# Altium PCB Rackmount_DSP.PcbDoc (part 2 of 24)
Units mil, origin at the board's own origin, x right, y up, seen from the top; angles counter-clockwise.
Board outline 10629.92 x 8267.72 mil, 4 copper layers (Top Layer, Mid Layer 1, Mid Layer 2, Bottom Layer), stack 36.2 mil thick; 4500 components, 1565 nets, 9765 pads, 3289 vias.
Unrouted connection lines stored in the file: 1.
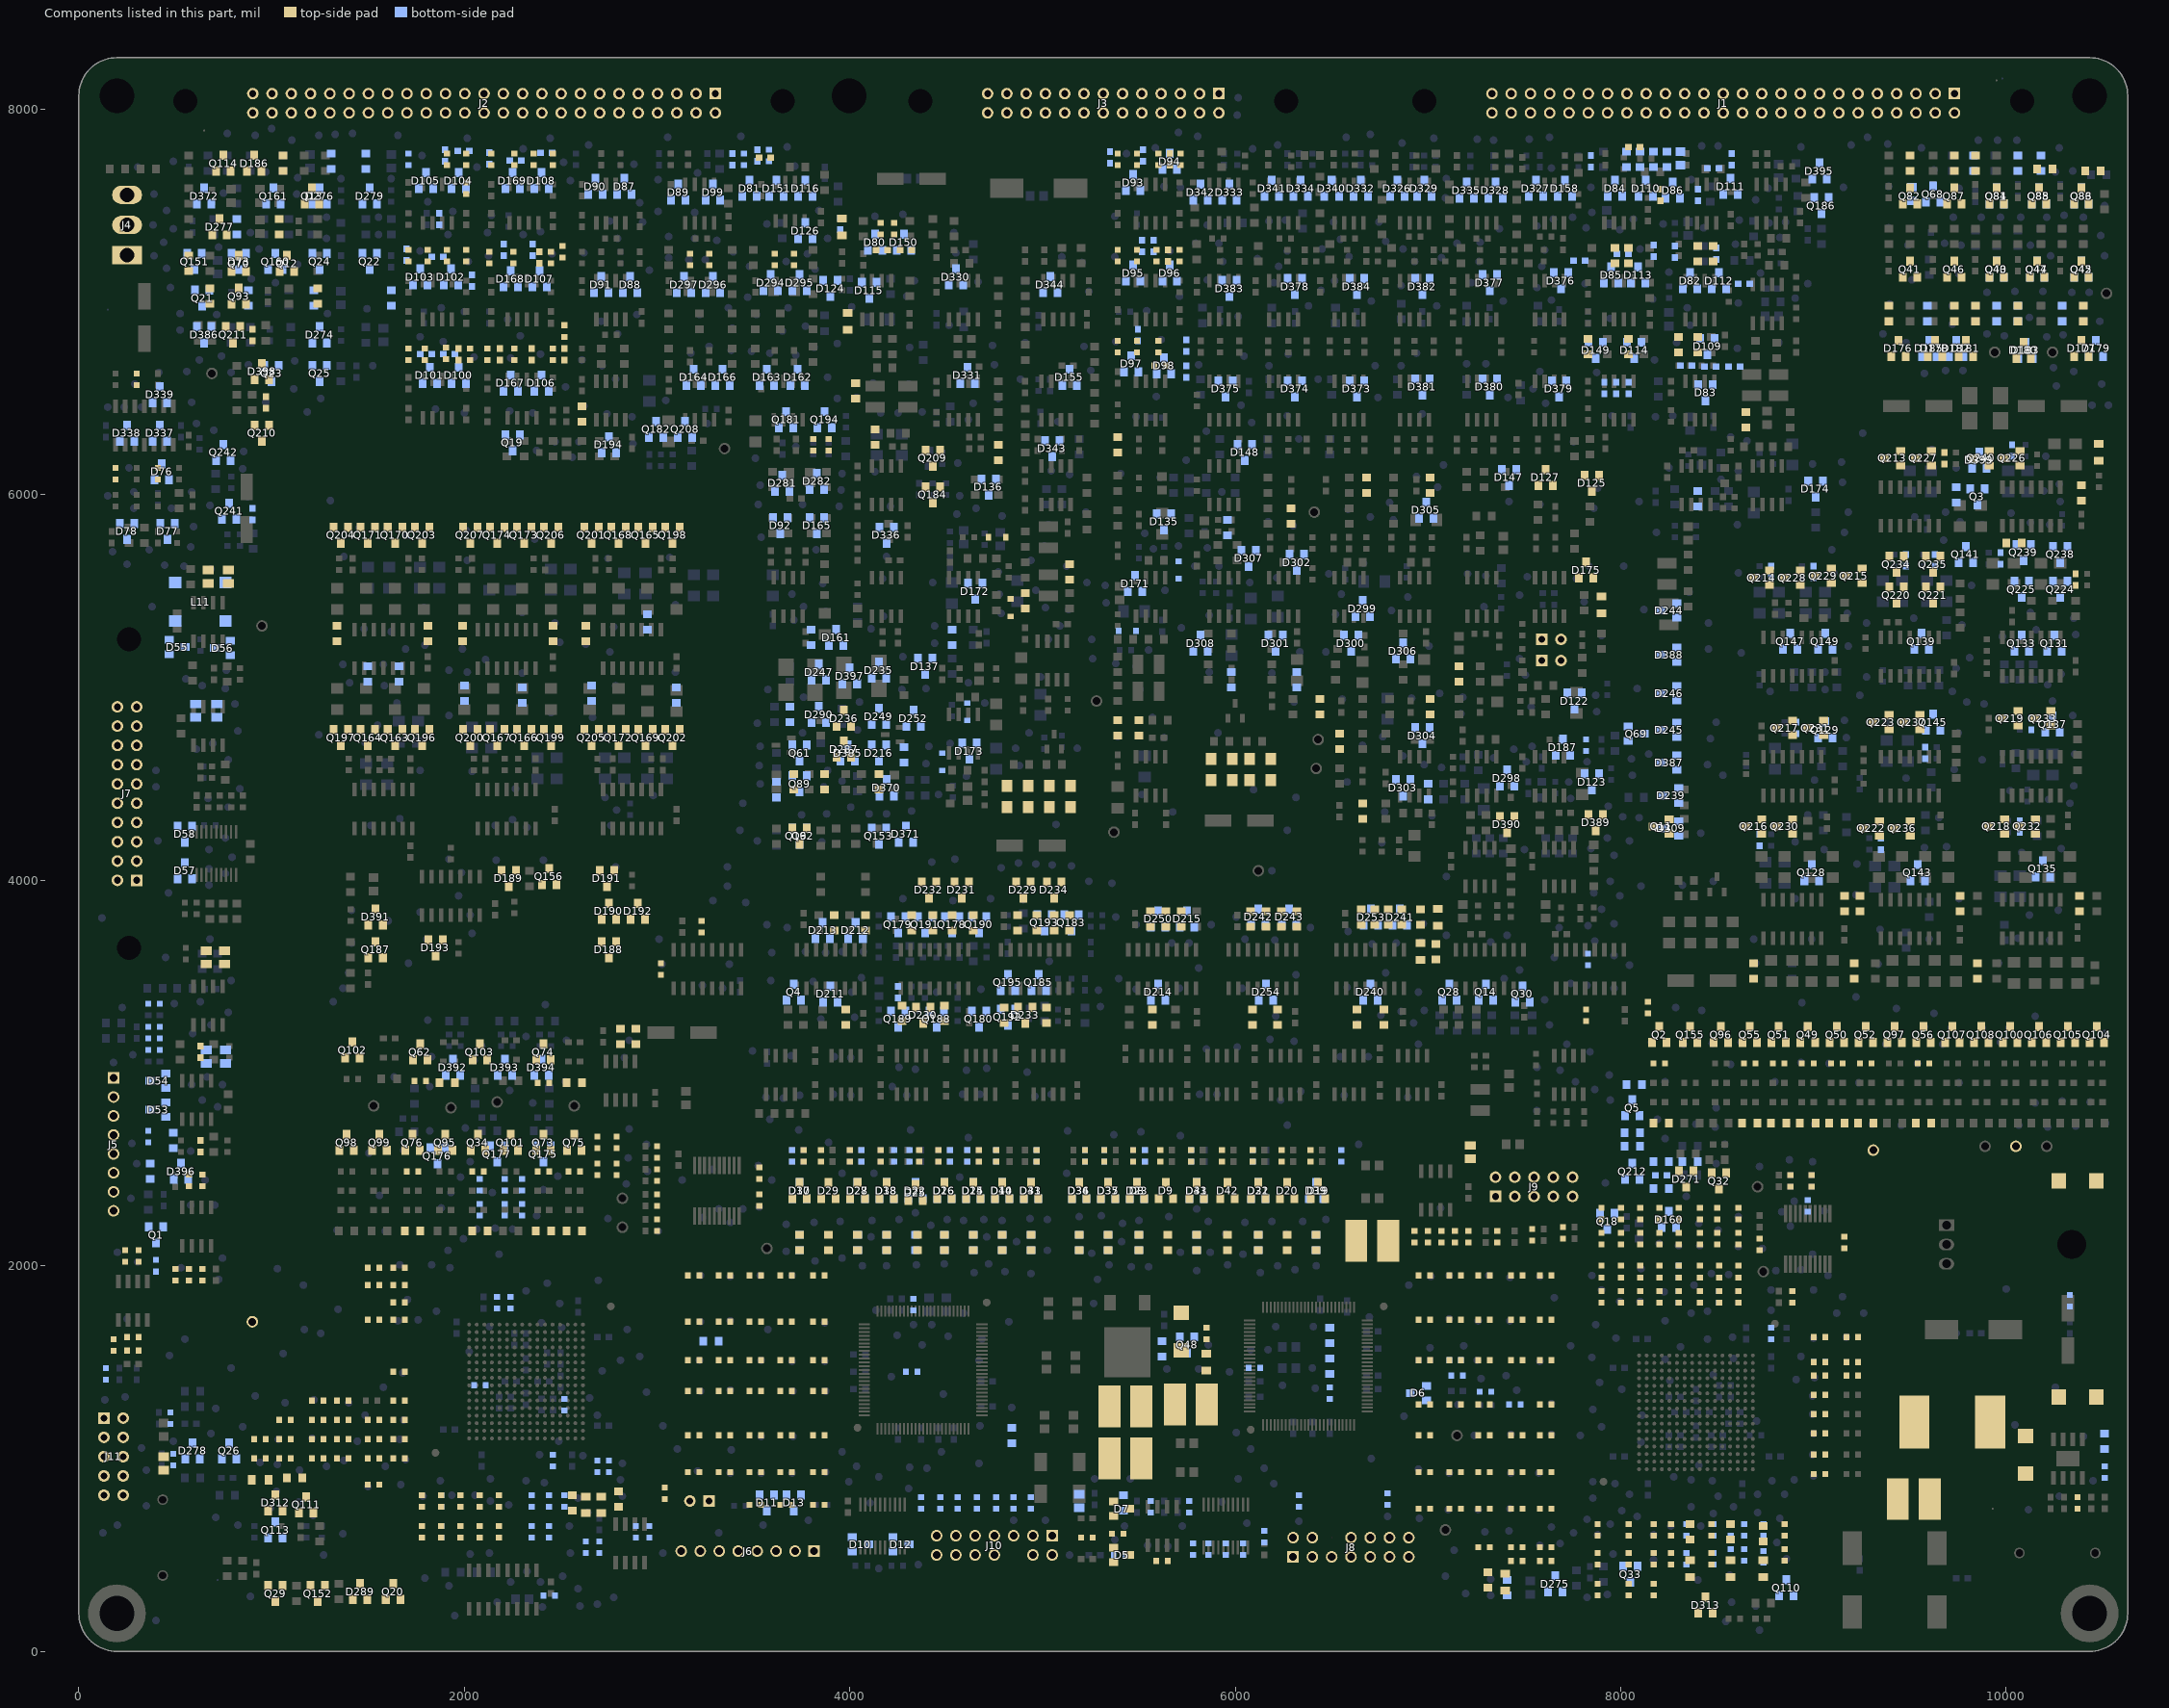
[diagram p4: the components of this part, seen from the top]

## Components (designator, comment, footprint, x,y, rotation, side; value= is the part's Value field where it differs from the comment) (continued)
C1156 "08070504" sc0603 4250,3420 r90 bottom
C1157 "08070504" sc0603 900,6830 r90 top
C1158 "08070230" sc0603 970,6480 r270 top
C1159 "08070230" sc0603 8210,2470 r180 bottom
C1160 "08070230" sc0603 10030,6230 r270 bottom
C1161 "08070230" sc0603 9680,6190 r270 top
C1162 "08070230" sc0603 9480,5660 r270 bottom
C1163 "08070230" sc0603 9630,5660 r270 bottom
C1164 "08070230" sc0603 9580,4660 r90 bottom
C1165 "08070230" sc0603 9350,4190 r270 bottom
C1166 "08070230" sc0603 8780,5600 r270 bottom
C1167 "08070230" sc0603 9000,5600 r270 bottom
C1168 "08070230" sc0603 8720,4210 r270 bottom
C1169 "08070230" sc0603 8910,4790 r270 bottom
C1170 "08070230" sc0603 10360,5560 r270 top
C1171 "08070230" sc0603 9970,5670 r270 bottom
C1172 "08070230" sc0603 10070,4280 r270 bottom
C1173 "08070230" sc0603 10130,4810 r270 bottom
C1174 "08070247" sc0603 630,2620 r270 top
C1175 "08070247" sc0603 630,3110 r90 top
C1176 "08070018" SC0805 8310,7745 r270 bottom
C1177 "08070018" SC0805 9510,7560 r270 bottom
C1178 "08070230" sc0603 900,5900 r270 bottom
C1200 "08070230" sc0603 5350,7750 r90 bottom
C1201 "08070230" sc0603 5520,7760 r90 bottom
C1202 "08070230" sc0603 5660,7740 r270 top
C1203 "08070230" sc0603 5515,7290 r90 bottom
C1204 "08070230" sc0603 5575,7290 r90 bottom
C1205 "08070230" sc0603 5650,7240 r270 top
C1206 "08070230" sc0603 5495,6830 r90 bottom
C1207 "08070230" sc0603 5745,6775 r270 bottom
C1208 "08070230" sc0603 5745,6640 r270 bottom
C1209 "08070230" sc0603 1800,6730 r180 bottom
C1210 "08070230" sc0603 1920,6730 r0 bottom
C1211 "08070230" sc0603 1970,6730 r270 top
C1212 "08070230" sc0603 1700,7245 r90 bottom
C1213 "08070230" sc0603 1860,7235 r0 bottom
C1214 "08070230" sc0603 2040,7110 r270 bottom
C1215 "08070230" sc0603 1900,7760 r90 bottom
C1216 "08070230" sc0603 1995,7785 r0 bottom
C1217 "08070230" sc0603 1870,7430 r270 bottom
C1218 "08070230" sc0603 8340,6670 r180 bottom
C1219 "08070230" sc0603 8465,6665 r0 bottom
C1220 "08070230" sc0603 8590,6665 r0 bottom
C1221 "08070230" sc0603 7845,7730 r90 bottom
C1222 "08070230" sc0603 8070,7805 r0 top
C1223 "08070230" sc0603 8205,7555 r270 top
C1224 "08070230" sc0603 8400,7555 r270 bottom
C1225 "08070230" sc0603 8480,7695 r0 bottom
C1226 "08070230" sc0603 8575,7740 r90 bottom
C1227 "08070230" sc0603 8280,7260 r90 bottom
C1228 "08070230" sc0603 8495,7250 r270 bottom
C1229 "08070230" sc0603 8640,7095 r180 bottom
C1230 "08070230" sc0603 2185,6730 r90 top
C1231 "08070230" sc0603 2350,6730 r90 top
C1232 "08070230" sc0603 2520,6730 r270 top
C1233 "08070230" sc0603 2205,7270 r90 bottom
C1234 "08070230" sc0603 2355,7270 r90 bottom
C1235 "08070230" sc0603 2390,7230 r270 top
C1236 "08070230" sc0603 2130,7745 r90 bottom
C1237 "08070230" sc0603 2265,7735 r0 bottom
C1238 "08070230" sc0603 2425,7775 r0 bottom
C1239 "08070230" sc0603 7785,7215 r180 bottom
C1240 "08070230" sc0603 8010,7250 r0 bottom
C1241 "08070230" sc0603 8170,7265 r270 bottom
C1242 "08070230" sc0603 7915,6555 r270 bottom
C1243 "08070230" sc0603 7975,6555 r270 bottom
C1244 "08070230" sc0603 8040,6555 r270 bottom
C1245 "08070230" sc0603 3950,7405 r90 bottom
C1246 "08070230" sc0603 4165,7270 r0 top
C1247 "08070230" sc0603 4290,7270 r0 top
C1248 "08070230" sc0603 3390,7740 r90 bottom
C1249 "08070230" sc0603 3520,7760 r270 bottom
C1250 "08070230" sc0603 3560,7750 r180 top
D1 "15010198" SD2216 10370,2440 r180 top
D2 "15010198" SD2216 10100,1020 r270 top
D3 "15010198" SD2216 10370,1320 r180 top
D4 "15010198" SD2216 5720,1660 r270 top
D5 "15010249" sot23-1 5410,500 r270 top
D6 "15010249" sot23-1 6950,1340 r270 bottom
D7 "15010249" sot23-1 5410,740 r270 top
D8 "15010249" sot23-1 5490,2390 r180 bottom
D9 "15010249" sot23-1 5640,2390 r0 top
D10 "15010249" sot23-1 4055,555 r90 bottom
D11 "15010249" sot23-1 3570,770 r0 bottom
D12 "15010249" sot23-1 4265,555 r90 bottom
D13 "15010249" sot23-1 3710,770 r0 bottom
D14 "15010249" sot23-1 4790,2390 r0 top
D15 "15010249" sot23-1 4640,2390 r180 bottom
D16 "15010249" sot23-1 4490,2390 r0 top
D17 "15010249" sot23-1 3740,2390 r180 bottom
D18 "15010249" sot23-1 4190,2390 r0 top
D19 "15010249" sot23-1 6430,2390 r0 top
D20 "15010249" sot23-1 6270,2390 r0 top
D21 "15010249" sot23-1 6120,2390 r0 top
D22 "15010249" sot23-1 4340,2390 r180 bottom
D23 "15010249" sot23-1 5490,2390 r0 top
D24 "15010249" sot23-1 4640,2390 r0 top
D25 "15010249" sot23-1 4340,2380 r0 top
D26 "15010249" sot23-1 4490,2390 r180 bottom
D27 "15010249" sot23-1 4040,2390 r180 bottom
D28 "15010249" sot23-1 4040,2390 r0 top
D29 "15010249" sot23-1 3890,2390 r0 top
D30 "15010249" sot23-1 3740,2390 r0 top
D31 "15010249" sot23-1 5800,2390 r180 bottom
D32 "15010249" sot23-1 6120,2390 r180 bottom
D33 "15010249" sot23-1 4940,2390 r180 bottom
D34 "15010249" sot23-1 5190,2390 r180 bottom
D35 "15010249" sot23-1 5340,2390 r180 bottom
D36 "15010249" sot23-1 5190,2390 r0 top
D37 "15010249" sot23-1 5340,2390 r0 top
D38 "15010249" sot23-1 4190,2390 r180 bottom
D39 "15010249" sot23-1 6420,2390 r180 bottom
D40 "15010249" sot23-1 4790,2390 r180 bottom
D41 "15010249" sot23-1 4940,2390 r0 top
D42 "15010249" sot23-1 5960,2390 r0 top
D43 "15010249" sot23-1 5800,2390 r0 top
D44 "15020063" SD0805 7400,360 r90 top
D45 "15020063" SD0805 5850,1500 r90 top
D46 "15020063" SD0805 6960,3630 r90 top
D47 "15020063" SD0805 8740,430 r270 top
D48 "15020063" SD0805 940,890 r180 top
D49 "15020063" SD0805 10480,6220 r90 top
D50 "15020063" SD0805 7050,3809.09 r270 top
D51 "15020063" SD0805 8570,430 r270 top
D52 "15020063" SD0805 2710,760 r90 top
D53 "15040117" sot23-1 410,2810 r270 bottom
D54 "15040117" sot23-1 410,2960 r270 bottom
D55 "15040117" sot23-1 510,5210 r90 bottom
D56 "15040117" sot23-1 745,5205 r270 bottom
D57 "15040117" sot23-1 550,4050 r180 bottom
D58 "15040117" sot23-1 550,4240 r0 bottom
D67 "15020062" SD0805 8360,430 r270 top
D68 "15020062" SD0805 2630,760 r90 top
D70 "15020062" SD0805 7900,5430 r90 top
D71 "15020062" SD0805 3990,6900 r270 top
D72 "15020062" SD0805 3960,7390 r90 top
D73 "15010035" sot23-1 830,7210 r0 bottom
D76 "15010035" sot23-1 430,6120 r180 bottom
D77 "15010035" sot23-1 460,5810 r0 bottom
D78 "15010035" sot23-1 250,5810 r0 bottom
D80 "15010035" sot23-1 4130,7310 r180 bottom
D81 "15010035" sot23-1 3480,7590 r180 bottom
D82 "15010035" sot23-1 8360,7110 r180 bottom
D83 "15010035" sot23-1 8440,6530 r0 bottom
D84 "15010035" sot23-1 7970,7590 r180 bottom
D85 "15010035" sot23-1 7950,7140 r180 bottom
D86 "15010035" sot23-1 8270,7580 r180 bottom
D87 "15010035" sot23-1 2830,7600 r180 bottom
D88 "15010035" sot23-1 2860,7090 r180 bottom
D89 "15010035" sot23-1 3110,7570 r180 bottom
D90 "15010035" sot23-1 2680,7600 r180 bottom
D91 "15010035" sot23-1 2710,7090 r180 bottom
D92 "15010035" sot23-1 3640,5840 r0 bottom
D93 "15010035" sot23-1 5470,7620 r180 bottom
D94 "15010035" sot23-1 5660,7730 r180 bottom
D95 "15010035" sot23-1 5470,7150 r180 bottom
D96 "15010035" sot23-1 5660,7150 r180 bottom
D97 "15010035" sot23-1 5460,6680 r180 bottom
D98 "15010035" sot23-1 5630,6670 r180 bottom
D99 "15010035" sot23-1 3290,7570 r180 bottom
D100 "15010035" sot23-1 1970,6620 r180 bottom
D101 "15010035" sot23-1 1820,6620 r180 bottom
D102 "15010035" sot23-1 1930,7130 r180 bottom
D103 "15010035" sot23-1 1770,7130 r180 bottom
D104 "15010035" sot23-1 1970,7630 r180 bottom
D105 "15010035" sot23-1 1800,7630 r180 bottom
D106 "15010035" sot23-1 2400,6580 r180 bottom
D107 "15010035" sot23-1 2390,7120 r180 bottom
D108 "15010035" sot23-1 2400,7630 r180 bottom
D109 "15010035" sot23-1 8450,6770 r0 bottom
D110 "15010035" sot23-1 8130,7590 r180 bottom
D111 "15010035" sot23-1 8570,7600 r180 bottom
D112 "15010035" sot23-1 8510,7110 r180 bottom
D113 "15010035" sot23-1 8090,7140 r180 bottom
D114 "15010035" sot23-1 8070,6750 r0 bottom
D115 "15010035" sot23-1 4100,7060 r0 bottom
D116 "15010035" sot23-1 3770,7590 r180 bottom
D122 "15010035" sot23-1 7760,4930 r0 bottom
D123 "15010035" sot23-1 7850,4510 r0 bottom
D124 "15010035" sot23-1 3900,7070 r0 bottom
D125 "15010035" sot23-1 7850,6060 r180 top
D126 "15010035" sot23-1 3770,7370 r180 bottom
D127 "15010035" sot23-1 7610,6090 r0 top
D135 "15010035" sot23-1 5630,5860 r0 bottom
D136 "15010035" sot23-1 4720,6040 r0 bottom
D137 "15010035" sot23-1 4390,5110 r0 bottom
D147 "15010035" sot23-1 7420,6090 r0 bottom
D148 "15010035" sot23-1 6050,6220 r0 bottom
D149 "15010035" sot23-1 7870,6750 r0 bottom
D150 "15010035" sot23-1 4280,7310 r180 bottom
D151 "15010035" sot23-1 3620,7590 r180 bottom
D155 "15010035" sot23-1 5140,6610 r180 bottom
D158 "15010035" sot23-1 7710,7590 r180 bottom
D160 "15010041" sot23-1 8250,2240 r180 bottom
D161 "15010040" sot23-1 3930,5260 r180 bottom
D162 "15010035" sot23-1 3730,6610 r180 bottom
D163 "15010035" sot23-1 3570,6610 r180 bottom
D164 "15010035" sot23-1 3190,6610 r180 bottom
D165 "15010035" sot23-1 3830,5840 r0 bottom
D166 "15010035" sot23-1 3340,6610 r180 bottom
D167 "15010035" sot23-1 2240,6580 r180 bottom
D168 "15010035" sot23-1 2240,7120 r180 bottom
D169 "15010035" sot23-1 2250,7630 r180 bottom
D171 "15010041" sot23-1 5480,5540 r180 bottom
D172 "15010041" sot23-1 4650,5500 r0 bottom
D173 "15010041" sot23-1 4620,4670 r0 bottom
D174 "15010041" sot23-1 9010,6030 r0 bottom
D175 "15010041" sot23-1 7820,5610 r0 top
D176 "15010041" sot23-1 9440,6760 r0 top
D177 "15010041" sot23-1 10390,6760 r0 top
D178 "15010041" sot23-1 9630,6760 r0 top
D179 "15010041" sot23-1 10465,6760 r180 bottom
D180 "15010041" sot23-1 10090,6750 r0 top
D181 "15010041" sot23-1 9790,6760 r0 top
D182 "15010041" sot23-1 9740,6760 r180 bottom
D183 "15010041" sot23-1 10100,6750 r180 bottom
D185 "15010041" sot23-1 9600,6760 r180 bottom
D186 "15010041" sot23-1 910,7720 r0 top
D187 "15010041" sot23-1 7700,4690 r180 bottom
D188 "15010041" sot23-1 2750,3640 r180 top
D189 "15010041" sot23-1 2230,4010 r180 top
D190 "15010041" sot23-1 2750,3840 r0 top
D191 "15010041" sot23-1 2740,4010 r180 top
D192 "15010041" sot23-1 2900,3840 r0 top
D193 "15010041" sot23-1 1850,3650 r180 top
D194 "15010041" sot23-1 2750,6260 r180 bottom
D211 "15010040" sot23-1 3900,3410 r180 bottom
D212 "15010040" sot23-1 4030,3740 r180 bottom
D213 "15010040" sot23-1 3860,3740 r180 bottom
D214 "15010040" sot23-1 5600,3420 r180 bottom
D215 "15010040" sot23-1 5750,3800 r180 bottom
D216 "15010040" sot23-1 4150,4660 r0 bottom
D229 "15010040" sot23-1 4900,3950 r180 top
D230 "15010040" sot23-1 4380,3300 r180 top
D231 "15010040" sot23-1 4580,3950 r180 top
D232 "15010040" sot23-1 4410,3950 r180 top
D233 "15010040" sot23-1 4910,3300 r180 top
D234 "15010040" sot23-1 5060,3950 r180 top
D235 "15010040" sot23-1 4150,5090 r180 bottom
D236 "15010040" sot23-1 3970,4840 r0 top
D239 "15010040" sot23-1 8260,4440 r270 bottom
D240 "15010040" sot23-1 6700,3420 r180 bottom
D241 "15010040" sot23-1 6854.31,3809.09 r180 bottom
D242 "15010040" sot23-1 6120,3810 r180 bottom
D243 "15010040" sot23-1 6280,3810 r180 bottom
D244 "15010040" sot23-1 8250,5400 r270 bottom
D245 "15010040" sot23-1 8250,4780 r270 bottom
D246 "15010040" sot23-1 8250,4970 r270 bottom
D247 "15010040" sot23-1 3840,5080 r180 bottom
D249 "15010040" sot23-1 4150,4850 r180 bottom
D250 "15010040" sot23-1 5600,3800 r180 bottom
D252 "15010040" sot23-1 4330,4840 r180 bottom
D253 "15010040" sot23-1 6704.31,3809.09 r180 bottom
D254 "15010040" sot23-1 6160,3420 r180 bottom
D271 "15040001" sot23-1 8340,2450 r180 top
D274 "15040001" sot23-1 1250,6830 r180 bottom
D275 "15040001" sot23-1 7660,350 r180 bottom
D276 "15040001" sot23-1 1250,7550 r180 bottom
D277 "15040001" sot23-1 730,7390 r0 top
D278 "15040001" sot23-1 590,1040 r180 bottom
D279 "15040001" sot23-1 1510,7550 r180 bottom
D281 "15040149" sot23-1 3650,6060 r180 bottom
D282 "15040149" sot23-1 3830,6070 r180 bottom
D287 "15040149" sot23-1 3970,4680 r0 top
D289 "15040149" sot23-1 1460,310 r0 top
D290 "15040149" sot23-1 3840,4860 r180 bottom
D294 "15040149" sot23-1 3590,7100 r180 bottom
D295 "15040149" sot23-1 3740,7100 r180 bottom
D296 "15040149" sot23-1 3290,7090 r180 bottom
D297 "15040149" sot23-1 3140,7090 r180 bottom
D298 "15010040" sot23-1 7410,4530 r180 bottom
D299 "15010040" sot23-1 6660,5410 r180 bottom
D300 "15010040" sot23-1 6600,5230 r0 bottom
D301 "15010040" sot23-1 6210,5230 r0 bottom
D302 "15010040" sot23-1 6320,5650 r0 bottom
D303 "15010040" sot23-1 6870,4480 r0 bottom
D304 "15010040" sot23-1 6970,4750 r0 bottom
D305 "15010040" sot23-1 6990,5920 r180 bottom
D306 "15010040" sot23-1 6870,5190 r180 bottom
D307 "15010040" sot23-1 6070,5670 r0 bottom
D308 "15010040" sot23-1 5820,5230 r180 bottom
D309 "15010040" sot23-1 8260,4270 r270 bottom
D312 "15010042" sot23-1 1020,770 r0 top
D313 "15010042" sot23-1 8440,240 r0 top
D326 "15010035" sot23-1 6840,7590 r180 bottom
D327 "15010035" sot23-1 7560,7590 r180 bottom
D328 "15010035" sot23-1 7350,7580 r180 bottom
D329 "15010035" sot23-1 6980,7590 r180 bottom
D330 "15010035" sot23-1 4550,7130 r180 bottom
D331 "15010035" sot23-1 4610,6620 r180 bottom
D332 "15010035" sot23-1 6650,7590 r180 bottom
D333 "15010035" sot23-1 5970,7570 r180 bottom
D334 "15010035" sot23-1 6340,7590 r180 bottom
D335 "15010035" sot23-1 7200,7580 r180 bottom
D336 "15010035" sot23-1 4190,5790 r0 bottom
D337 "15010035" sot23-1 420,6320 r180 bottom
D338 "15010035" sot23-1 250,6320 r180 bottom
D339 "15010035" sot23-1 420,6520 r180 bottom
D340 "15010035" sot23-1 6500,7590 r180 bottom
D341 "15010035" sot23-1 6190,7590 r180 bottom
D342 "15010035" sot23-1 5820,7570 r180 bottom
D343 "15010035" sot23-1 5050,6240 r0 bottom
D344 "15010035" sot23-1 5040,7090 r180 bottom
D370 "15040001" sot23-1 4190,4480 r180 bottom
D371 "15040001" sot23-1 4290,4240 r180 bottom
D372 "15040001" sot23-1 650,7550 r180 bottom
D373 "15010249" sot23-1 6630,6550 r0 bottom
D374 "15010249" sot23-1 6310,6550 r0 bottom
D375 "15010249" sot23-1 5950,6550 r0 bottom
D376 "15010249" sot23-1 7690,7110 r0 bottom
D377 "15010249" sot23-1 7320,7100 r0 bottom
D378 "15010249" sot23-1 6310,7080 r0 bottom
D379 "15010249" sot23-1 7680,6550 r0 bottom
D380 "15010249" sot23-1 7320,6560 r0 bottom
D381 "15010249" sot23-1 6970,6560 r0 bottom
D382 "15010249" sot23-1 6970,7080 r0 bottom
D383 "15010249" sot23-1 5970,7070 r0 bottom
D384 "15010249" sot23-1 6630,7080 r0 bottom
D385 "15040149" sot23-1 3990,4660 r180 bottom
D386 "15010041" sot23-1 650,6830 r0 bottom
D387 "15010040" sot23-1 8250,4610 r270 bottom
D388 "15010040" sot23-1 8250,5170 r270 bottom
D389 "15010035" sot23-1 7870,4300 r180 top
D390 "15010035" sot23-1 7410,4290 r180 top
D391 "15040001" sot23-1 1540,3810 r0 top
D392 "15040001" sot23-1 1940,3030 r180 bottom
D393 "15040001" sot23-1 2210,3030 r180 bottom
D394 "15040001" sot23-1 2400,3030 r180 bottom
D395 "15040001" sot23-1 9030,7680 r180 bottom
D396 "15040149" sot23-1 530,2490 r180 bottom
D397 "15010040" sot23-1 4000,5060 r180 bottom
D398 "15040001" sot23-1 950,6640 r0 top
D399 "15010041" sot23-1 9860,6180 r180 bottom
D400 "15010293" SD1005 5705,5610 r270 bottom
D401 "15010293" SD1005 5440,5295 r180 bottom
D402 "15010293" SD1005 4765,5780 r0 top
D403 "15010293" SD1005 4835,5415 r270 top
D404 "15010293" SD1005 4610,4875 r270 bottom
D405 "15010293" SD1005 4480,4615 r90 bottom
J1 "14060167" idc50-otm1 8531.5,8031.5 r180 top locked
J2 "14060167" idc50-otm1 2102.36,8031.5 r180 top locked
J3 "14060012" idc26-otm1 5314.96,8031.5 r180 top locked
J4 "14100030" P101-3T-NEW 250,7400 r90 top
J5 "14100068" P2500-8T 180,2630 r90 top
J6 "14100068" P2500-8T 3470,520 r0 top
J7 "14060010" idc20-otm1 250,4450 r90 top
J8 "14050021" head0207-t 6600,540 r0 top
J9 "14050063" head0205-t 7550,2410 r0 top
J10 "14050021" head0207-t 4750,550 r180 top
J11 "14050063" head0205-t 180,1010 r270 top
J12 "14050028" head0102-t 3270,780 r180 top
J16 "14050028" head0102-t 7590,5140 r0 top
J17 "14050028" head0102-t 7590,5250 r0 top
J18 "14110100" TP40 9310,2600 r0 top
J19 "14110100" TP40 900,1710 r0 top
L1 "10030036" SPL-6P1-5P5 6710,2130 r90 top
L3 "10030036" SPL-6P1-5P5 5770,1280 r270 top
L4 "10030036" SPL-6P1-5P5 5430,1000 r90 top
L5 "10030036" SPL-6P1-5P5 5430,1270 r90 top
L6 "10030036" SPL-6P1-5P5 9520,790 r90 top
L7 "17010147" SL0805 7220,2590 r90 top
L8 "17010147" SL0805 440,975 r90 top
L9 "17010147" SL0805 5190,780 r90 bottom
L10 "10031075" SPL-12P8-12P8-A 9720,1190 r0 top
L11 "10041257" STFM4-100-275 630,5445 r270 bottom
L12 "10070006" SL0805 715,4880 r270 bottom
L13 "10070006" SL0805 605,4880 r270 bottom
L14 "10070006" SL0805 755,3600 r90 top
L15 "10070006" SL0805 660,3600 r90 top
L16 "10070006" SL0805 660,3085 r90 bottom
L17 "10070006" SL0805 775,5575 r90 top
L18 "10070006" SL0805 670,5575 r90 top
L19 "10070006" SL0805 760,3085 r90 bottom
Q1 "15050026" sot23-1 400,2160 r0 bottom
Q2 "15050026" sot23-1 8200,3200 r0 top
Q3 "15050026" sot23-1 9850,5990 r0 bottom
Q4 "15050026" sot23-1 3710,3420 r180 bottom
Q5 "15050072" sot23-1 8060,2820 r180 bottom
Q9 "15050026" sot23-1 3740,4230 r0 bottom
Q11 "15050026" sot23-1 8210,4280 r90 top
Q12 "15050026" sot23-1 1080,7200 r0 top
Q13 "15050026" sot23-1 1210,7550 r0 top
Q14 "15050026" sot23-1 7300,3420 r180 bottom
Q18 "15050026" sot23-1 7930,2230 r0 bottom
Q19 "15050026" sot23-1 2250,6270 r0 bottom
Q20 "15050026" sot23-1 1630,310 r0 top
Q21 "15050026" sot23-1 640,7020 r0 bottom
Q22 "15050026" sot23-1 1510,7210 r0 bottom
Q23 "15050026" sot23-1 1000,6630 r0 bottom
Q24 "15050026" sot23-1 1250,7210 r0 bottom
Q25 "15050026" sot23-1 1250,6630 r0 bottom
Q26 "15050026" sot23-1 780,1040 r180 bottom
Q28 "15050026" sot23-1 7110,3420 r180 bottom
Q29 "15050026" sot23-1 1020,300 r180 top
Q30 "15050026" sot23-1 7490,3410 r180 bottom
Q32 "15050026" sot23-1 8510,2440 r180 top
Q33 "15050026" sot23-1 8050,400 r0 bottom
Q34 "15050026" sot23-1 2070,2640 r0 top
Q40 "15050026" sot23-1 9950,7170 r0 top
Q41 "15050026" sot23-1 9500,7170 r0 top
Q42 "15050026" sot23-1 10390,7170 r180 bottom
Q43 "15050026" sot23-1 9950,7170 r180 bottom
Q44 "15050026" sot23-1 10160,7170 r0 top
Q45 "15050026" sot23-1 10390,7170 r0 top
Q46 "15050026" sot23-1 9730,7170 r0 top
Q47 "15050026" sot23-1 10160,7170 r180 bottom
Q48 "15050026" sot23-1 5750,1590 r0 bottom
Q49 "15050026" sot23-1 8970,3200 r0 top
Q50 "15050026" sot23-1 9120,3200 r0 top
Q51 "15050026" sot23-1 8820,3200 r0 top
Q52 "15050026" sot23-1 9270,3200 r0 top
Q55 "15050026" sot23-1 8670,3200 r0 top
Q56 "15050026" sot23-1 9570,3200 r0 top
Q61 "15050026" sot23-1 3740,4660 r0 bottom
Q62 "15050026" sot23-1 1770,3110 r0 top
Q68 "15050026" sot23-1 9620,7560 r180 bottom
Q69 "15050026" sot23-1 8080,4760 r90 bottom
Q70 "15050026" sot23-1 830,7200 r0 top
Q73 "15050026" sot23-1 2410,2640 r0 top
Q74 "15050026" sot23-1 2410,3110 r0 top
Q75 "15050026" sot23-1 2570,2640 r0 top
Q76 "15050026" sot23-1 1730,2640 r0 top
Q81 "15050072" sot23-1 9950,7550 r0 top
Q82 "15050072" sot23-1 9500,7550 r0 top
Q83 "15050072" sot23-1 10390,7550 r180 bottom
Q84 "15050072" sot23-1 9950,7550 r180 bottom
Q85 "15050072" sot23-1 10170,7550 r0 top
Q86 "15050072" sot23-1 10390,7550 r0 top
Q87 "15050072" sot23-1 9730,7550 r0 top
Q88 "15050072" sot23-1 10170,7550 r180 bottom
Q89 "15050072" sot23-1 3740,4500 r0 bottom
Q93 "15050072" sot23-1 830,7030 r0 top
Q95 "15050026" sot23-1 1900,2640 r0 top
Q96 "15050026" sot23-1 8520,3200 r0 top
Q97 "15050026" sot23-1 9420,3200 r0 top
Q98 "15050026" sot23-1 1390,2640 r0 top
Q99 "15050026" sot23-1 1560,2640 r0 top
Q100 "15050026" sot23-1 10020,3200 r0 top
Q101 "15050026" sot23-1 2240,2640 r0 top
Q102 "15050026" sot23-1 1420,3120 r0 top
Q103 "15050026" sot23-1 2080,3110 r0 top
Q104 "15050026" sot23-1 10470,3200 r0 top
Q105 "15050026" sot23-1 10320,3200 r0 top
Q106 "15050026" sot23-1 10170,3200 r0 top
Q107 "15050026" sot23-1 9720,3200 r0 top
Q108 "15050026" sot23-1 9870,3200 r0 top
Q110 "15050026" sot23-1 8860,330 r180 bottom
Q111 "15050026" sot23-1 1180,760 r0 top
Q113 "15050026" sot23-1 1020,630 r180 bottom
Q114 "15050026" sot23-1 750,7720 r0 top
Q128 "15050026" sot23-1 8990,4040 r180 bottom
Q129 "15050026" sot23-1 9060,4780 r180 bottom
Q131 "15050026" sot23-1 10250,5230 r180 bottom
Q133 "15050026" sot23-1 10080,5230 r180 bottom
Q135 "15050026" sot23-1 10190,4060 r180 bottom
Q137 "15050026" sot23-1 10240,4810 r180 bottom
Q139 "15050026" sot23-1 9560,5240 r180 bottom
Q141 "15050026" sot23-1 9790,5690 r180 bottom
Q143 "15050026" sot23-1 9540,4040 r180 bottom
Q145 "15050026" sot23-1 9620,4820 r180 bottom
Q147 "15050026" sot23-1 8880,5240 r180 bottom
Q149 "15050026" sot23-1 9060,5240 r180 bottom
Q151 "15050026" sot23-1 600,7210 r0 bottom
Q152 "15050026" sot23-1 1240,300 r180 top
Q153 "15050026" sot23-1 4150,4230 r0 bottom
Q155 "15050026" sot23-1 8360,3200 r0 top
Q156 "15050026" sot23-1 2440,4020 r0 top
Q160 "15050026" sot23-1 1020,7210 r180 bottom
Q161 "15050072" sot23-1 1010,7550 r180 bottom
Q162 "15050072" sot23-1 3740,4230 r180 top
Q163 "15050026" sot23-1 1640,4740 r180 top
Q164 "15050026" sot23-1 1500,4740 r180 top
Q165 "15050026" sot23-1 2940,5790 r180 top
Q166 "15050026" sot23-1 2310,4740 r180 top
Q167 "15050026" sot23-1 2170,4740 r180 top
Q168 "15050026" sot23-1 2800,5790 r180 top
Q169 "15050026" sot23-1 2940,4740 r180 top
Q170 "15050026" sot23-1 1640,5790 r180 top
Q171 "15050026" sot23-1 1500,5790 r180 top
Q172 "15050026" sot23-1 2800,4740 r180 top
Q173 "15050026" sot23-1 2310,5790 r180 top
Q174 "15050026" sot23-1 2170,5790 r180 top
Q175 "15050026" sot23-1 2410,2580 r0 bottom
Q176 "15050026" sot23-1 1860,2570 r0 bottom
Q177 "15050026" sot23-1 2170,2580 r0 bottom
Q178 "15050026" sot23-1 4530,3770 r0 bottom
Q179 "15050026" sot23-1 4250,3770 r0 bottom
Q180 "15050026" sot23-1 4670,3280 r0 bottom
Q181 "15050026" sot23-1 3670,6390 r180 bottom
Q182 "15050026" sot23-1 2995,6340 r180 bottom
Q183 "15050026" sot23-1 5150,3780 r0 bottom
Q184 "15050026" sot23-1 4430,6000 r180 top
Q185 "15050026" sot23-1 4980,3470 r180 bottom
Q186 "15050026" sot23-1 9040,7500 r0 bottom
Q187 "15050026" sot23-1 1540,3640 r0 top
Q188 "15050026" sot23-1 4450,3280 r0 bottom
Q189 "15050072" sot23-1 4250,3280 r0 bottom
Q190 "15050072" sot23-1 4670,3770 r0 bottom
Q191 "15050072" sot23-1 4390,3770 r0 bottom
Q192 "15050072" sot23-1 4820,3290 r0 bottom
Q193 "15050072" sot23-1 5010,3780 r0 bottom
Q194 "15050072" sot23-1 3870,6390 r180 bottom
Q195 "15050072" sot23-1 4820,3470 r180 bottom
Q196 "15050072" sot23-1 1780,4740 r180 top
Q197 "15050072" sot23-1 1360,4740 r180 top
Q198 "15050072" sot23-1 3080,5790 r180 top
Q199 "15050072" sot23-1 2450,4740 r180 top
Q200 "15050072" sot23-1 2030,4740 r180 top
Q201 "15050072" sot23-1 2660,5790 r180 top
Q202 "15050072" sot23-1 3080,4740 r180 top
Q203 "15050072" sot23-1 1780,5790 r180 top
Q204 "15050072" sot23-1 1360,5790 r180 top
Q205 "15050072" sot23-1 2660,4740 r180 top
Q206 "15050072" sot23-1 2450,5790 r180 top
Q207 "15050072" sot23-1 2030,5790 r180 top
Q208 "15050072" sot23-1 3145,6340 r180 bottom
Q209 "15050072" sot23-1 4430,6190 r180 top
Q210 "15050026" sot23-1 950,6320 r180 top
Q211 "15050072" sot23-1 800,6830 r180 top
Q212 "15050026" sot23-1 8060,2490 r180 bottom
Q213 "15050026" sot23-1 9410,6190 r90 top
Q214 "15050026" sot23-1 8730,5570 r90 top
Q215 "15050026" sot23-1 9210,5580 r90 top
Q216 "15050026" sot23-1 8690,4280 r90 top
Q217 "15050026" sot23-1 8850,4790 r90 top
Q218 "15050026" sot23-1 9950,4280 r90 top
Q219 "15050026" sot23-1 10020,4840 r90 top
Q220 "15050026" sot23-1 9430,5480 r180 top
Q221 "15050026" sot23-1 9620,5480 r180 top
Q222 "15050026" sot23-1 9300,4270 r90 top
Q223 "15050026" sot23-1 9350,4820 r90 top
Q224 "15050026" sot23-1 10280,5510 r0 bottom
Q225 "15050026" sot23-1 10080,5510 r0 bottom
Q226 "15050026" sot23-1 10030,6190 r90 top
Q227 "15050072" sot23-1 9570,6190 r90 top
Q228 "15050072" sot23-1 8890,5570 r90 top
Q229 "15050072" sot23-1 9050,5580 r90 top
Q230 "15050072" sot23-1 8850,4280 r90 top
Q231 "15050072" sot23-1 9010,4790 r90 top
Q232 "15050072" sot23-1 10110,4280 r90 top
Q233 "15050072" sot23-1 10190,4840 r90 top
Q234 "15050072" sot23-1 9430,5640 r180 top
Q235 "15050072" sot23-1 9620,5640 r180 top
Q236 "15050072" sot23-1 9460,4270 r90 top
Q237 "15050072" sot23-1 9510,4820 r90 top
Q238 "15050072" sot23-1 10280,5690 r0 bottom
Q239 "15050072" sot23-1 10090,5700 r0 bottom
Q240 "15050072" sot23-1 9870,6190 r90 top
Q241 "15050026" sot23-1 780,5915 r180 bottom
Q242 "15050072" sot23-1 750,6220 r180 bottom
R1 "07090459" sr0805 4940,2120 r270 bottom
R2 "07090459" sr0805 5190,2120 r270 bottom
R3 "07090459" sr0805 5340,2120 r270 bottom
R4 "07090459" sr0805 5190,2120 r270 top
R5 "07090459" sr0805 5340,2120 r270 top
R6 "07090459" sr0805 5500,2120 r270 bottom
R7 "07090459" sr0805 5500,2120 r270 top
R8 "07090459" sr0805 5650,2120 r270 top
R9 "07090459" sr0805 6120,2120 r270 bottom
R10 "07090459" sr0805 5960,2120 r270 top
R11 "07090459" sr0805 5800,2120 r270 top
R12 "07090459" sr0805 5800,2120 r270 bottom
R13 "07090459" sr0805 6420,2120 r270 top
R14 "07090459" sr0805 6420,2120 r270 bottom
R15 "07090459" sr0805 6270,2120 r270 top
R16 "07090459" sr0805 6120,2120 r270 top
R17 "07090986" SR0603 6100,1470 r0 bottom
R19 "07090890" SR0603 6330,780 r270 bottom
R20 "07090890" SR0603 5780,530 r270 bottom
R21 "07090890" SR0603 5860,530 r90 bottom
R22 "07090890" SR0603 5950,530 r90 bottom
R23 "07090890" SR0603 6040,530 r270 bottom
R24 "07090890" SR0603 6790,790 r270 bottom
R25 "07090890" SR0603 6150,595 r90 bottom
R26 "07090686" SR0603 7460,740 r0 top
R27 "07090686" SR0603 7140,740 r0 top
R28 "07090686" SR0603 7290,740 r0 top
R29 "07090686" SR0603 7610,740 r0 top
R30 "07090686" SR0603 7140,930 r0 top
R31 "07090686" SR0603 7460,930 r0 top
R32 "07090686" SR0603 6980,1120 r0 top
R33 "07090686" SR0603 7460,1120 r0 top
R34 "07090686" SR0603 7610,1120 r0 top
R35 "07090686" SR0603 6980,1280 r0 top
R36 "07090686" SR0603 7290,1280 r0 top
R37 "07090686" SR0603 7610,1510 r0 top
R38 "07090686" SR0603 7610,1720 r0 top
R39 "07090686" SR0603 7290,1720 r0 top
R40 "07090686" SR0603 7140,1950 r0 top
R41 "07090686" SR0603 6980,1950 r0 top
R42 "07090686" SR0603 6980,930 r0 top
R43 "07090686" SR0603 7290,930 r0 top
R44 "07090686" SR0603 7610,930 r0 top
R45 "07090686" SR0603 7290,1120 r0 top
R46 "07090686" SR0603 7140,1280 r180 top
R47 "07090686" SR0603 7610,1280 r0 top
R48 "07090686" SR0603 7460,1510 r0 top
R49 "07090686" SR0603 7290,1510 r0 top
R50 "07090686" SR0603 6980,1510 r0 top
R51 "07090686" SR0603 6980,1720 r0 top
R52 "07090686" SR0603 7460,1720 r180 top
R53 "07090686" SR0603 7140,1510 r0 top
R54 "07090686" SR0603 7140,1720 r180 top
R55 "07090686" SR0603 7610,1950 r0 top
R56 "07090686" SR0603 7460,1950 r180 top
R57 "07090686" SR0603 7290,1950 r0 top
R58 "07090686" SR0603 6930,2150 r270 top
R59 "07090686" SR0603 7000,2150 r270 top
R60 "07090686" SR0603 6980,740 r0 top
R61 "07090387" SR0603 2460,990 r270 bottom
R62 "07090387" SR0603 2690,960 r270 bottom
R63 "07090387" SR0603 2750,960 r270 bottom
R70 "07090554" sr0805 8210,2400 r0 bottom
R71 "07090035" sr0805 8210,2540 r180 bottom
R72 "07090035" sr0805 8060,2620 r0 bottom
R73 "07090534" sr0805 8060,2690 r180 bottom
R74 "07090035" sr0805 8070,2940 r180 bottom
R75 "07090231" sr0805 3800,5260 r90 bottom
R605 "07090686" SR0603 6490,1340 r90 bottom
R606 "07090459" sr0805 3740,2120 r270 bottom
R607 "07090459" sr0805 3740,2120 r270 top
R608 "07090459" sr0805 3890,2120 r270 top
R609 "07090459" sr0805 4040,2120 r270 top
R610 "07090459" sr0805 4040,2120 r270 bottom
R611 "07090459" sr0805 4190,2120 r270 top
R612 "07090459" sr0805 4190,2120 r270 bottom
R613 "07090459" sr0805 4340,2120 r270 bottom
R614 "07090459" sr0805 4640,2120 r270 top
R615 "07090459" sr0805 4490,2120 r270 bottom
R616 "07090459" sr0805 4490,2120 r270 top
R617 "07090459" sr0805 4350,2120 r270 top
R618 "07090459" sr0805 4790,2120 r270 bottom
R619 "07090459" sr0805 6490,1640 r90 bottom
R620 "07090459" sr0805 4840,1120 r270 bottom
R621 "07090459" sr0805 3280,1610 r180 bottom
R622 "07090459" sr0805 6490,1480 r270 bottom
R623 "07090459" sr0805 4790,2120 r270 top
R624 "07090459" sr0805 4940,2120 r270 top
R625 "07090459" sr0805 4640,2120 r270 bottom
R626 "07090986" SR0603 4330,1800 r90 bottom
R627 "07090890" SR0603 4560,770 r90 bottom
R628 "07090890" SR0603 4370,770 r270 bottom
R629 "07090890" SR0603 4470,770 r90 bottom
R630 "07090890" SR0603 940,1000 r0 top
R631 "07090890" SR0603 400,2000 r270 bottom
R632 "07090890" SR0603 8140,3340 r270 top
R633 "07090890" SR0603 180,1590 r90 top
R634 "07090890" SR0603 501.63,1954.11 r90 top
R638 "07090890" SR0603 2410,2490 r180 top
R643 "07090890" SR0603 8200,3050 r180 top
R644 "07090890" SR0603 8670,3050 r180 top
R645 "07090890" SR0603 8970,3050 r180 top
R646 "07090890" SR0603 9270,3050 r180 top
R647 "07090890" SR0603 9570,3050 r180 top
R648 "07090890" SR0603 9120,3050 r180 top
R649 "07090890" SR0603 8820,3050 r180 top
R650 "07090890" SR0603 1770,2960 r180 top
R651 "07090890" SR0603 2410,2950 r180 top
R652 "07090890" SR0603 2570,2490 r180 top
R653 "07090890" SR0603 2070,2490 r180 top
R654 "07090890" SR0603 1730,2490 r180 top
R660 "07090035" sr0805 880,7020 r90 bottom
R661 "07090890" SR0603 2790,2640 r270 top
R662 "07090890" SR0603 2170,1810 r90 bottom
R663 "07090890" SR0603 5230,590 r0 top
R664 "07090890" SR0603 8200,1970 r90 top
R665 "07090890" SR0603 1530,1900 r0 top
R666 "07090890" SR0603 1530,1720 r0 top
R667 "07090890" SR0603 1530,1200 r0 top
R668 "07090890" SR0603 8100,2270 r90 top
R669 "07090890" SR0603 8000,1970 r90 top
R670 "07090890" SR0603 8000,2270 r90 top
R671 "07090890" SR0603 8100,1970 r90 top
R672 "07090890" SR0603 1980,620 r90 top
R673 "07090890" SR0603 8480,480 r270 bottom
R674 "07090890" SR0603 1780,620 r90 top
R675 "07090890" SR0603 8740,490 r270 bottom
R678 "07090890" SR0603 940,1100 r0 top
R679 "07090890" SR0603 8470,480 r270 top
R680 "07090586" sr0805 490,2650 r90 bottom
R681 "07090890" SR0603 2350,620 r90 bottom
R682 "07090890" SR0603 8260,480 r270 top
R683 "07090890" SR0603 2690,2640 r270 top
R684 "07090890" SR0603 2180,620 r90 top
R685 "07090890" SR0603 8340,480 r270 bottom
R686 "07090890" SR0603 2080,620 r90 top
R687 "07090890" SR0603 8570,500 r270 bottom
R688 "07090890" SR0603 8170,320 r270 top
R689 "07090890" SR0603 2440,620 r90 bottom
R691 "07090890" SR0603 490,995 r90 bottom
R692 "07090890" SR0603 8610,1970 r90 top
R693 "07090890" SR0603 8850,500 r270 top
R694 "07090890" SR0603 1240,1000 r0 top
R703 "07090890" SR0603 1880,620 r90 bottom
R704 "07090890" SR0603 7700,2170 r90 top
R705 "07090890" SR0603 8510,1970 r90 top
R707 "07090686" SR0603 8300,2270 r90 top
R708 "07090890" SR0603 8410,2270 r90 top
R709 "07090890" SR0603 8300,1970 r90 top
R710 "07090890" SR0603 9200,1630 r0 top
R711 "07090890" SR0603 10510,930 r90 bottom
R712 "07090890" SR0603 3040,820 r270 top
R714 "07090890" SR0603 2520,1280 r270 bottom
R715 "07090890" SR0603 4660,770 r90 bottom
R716 "07090890" SR0603 4760,770 r270 bottom
R717 "07090890" SR0603 4850,770 r90 bottom
R718 "07090890" SR0603 4940,770 r270 bottom
R719 "07090890" SR0603 8610,2270 r90 top
R720 "07090890" SR0603 8500,2270 r90 top
R721 "07090890" SR0603 1530,1000 r0 top
R722 "07090890" SR0603 2210,2420 r270 bottom
R723 "07090890" SR0603 1880,620 r90 top
R724 "07090890" SR0603 2080,2420 r270 bottom
R725 "07090890" SR0603 7900,1970 r90 top
R727 "07090890" SR0603 1530,1990 r0 top
R731 "07090890" SR0603 8640,500 r270 bottom
R732 "07090890" SR0603 7900,2270 r90 top
R739 "07090890" SR0603 8300,1970 r90 bottom
R740 "07090890" SR0603 1240,1100 r0 top
R741 "07090890" SR0603 8410,1970 r90 top
R743 "07090890" SR0603 10370,770 r270 top
R744 "07090890" SR0603 1240,1200 r0 top
R745 "07090890" SR0603 1240,1300 r0 top
R746 "07090890" SR0603 7150,1430 r0 bottom
R747 "07090890" SR0603 9200,1430 r0 top
R748 "07090890" SR0603 7540,2160 r90 top
R749 "07090890" SR0603 475,1210 r270 bottom
R750 "07090890" SR0603 2700,540 r90 bottom
R751 "07090890" SR0603 2630,540 r270 bottom
R752 "07090890" SR0603 7140,2150 r270 top
R753 "07090890" SR0603 7070,2150 r270 top
R754 "07090890" SR0603 1530,1100 r0 top
R755 "07090890" SR0603 7820,4700 r270 bottom
R756 "07090890" SR0603 8200,2270 r90 top
R757 "07090890" SR0603 2300,2420 r270 bottom
R758 "07090890" SR0603 9200,1500 r0 top
R759 "07090890" SR0603 5760,750 r270 bottom
R760 "07090686" SR0603 5560,750 r90 bottom
R761 "07090686" SR0603 3890,6260 r270 top
R762 "07090686" SR0603 3710,7220 r270 top
R763 "07090686" SR0603 3170,7220 r270 top
R764 "07090686" SR0603 2440,290 r180 bottom
R765 "07090686" SR0603 3840,1120 r0 top
R766 "07090686" SR0603 3510,1120 r0 top
R767 "07090686" SR0603 3350,1350 r0 top
R768 "07090686" SR0603 3670,930 r0 top
R769 "07090686" SR0603 3190,1120 r0 top
R770 "07090686" SR0603 3840,1510 r0 top
R771 "07090686" SR0603 3840,930 r0 top
R772 "07090686" SR0603 3840,1350 r0 top
R773 "07090686" SR0603 3670,1510 r0 top
R774 "07090686" SR0603 3510,760 r0 top
R775 "07090686" SR0603 3510,1350 r0 top
R776 "07090686" SR0603 3510,1510 r0 top
R777 "07090686" SR0603 3670,1350 r0 top
R778 "07090686" SR0603 3840,1950 r0 top
R779 "07090686" SR0603 3190,1350 r0 top
R780 "07090686" SR0603 3190,1510 r0 top
R781 "07090686" SR0603 3510,930 r0 top
R782 "07090686" SR0603 4320,1450 r180 bottom
R783 "07090686" SR0603 3350,1510 r0 top
R784 "07090686" SR0603 3670,1710 r0 top
R785 "07090686" SR0603 3190,930 r0 top
R786 "07090686" SR0603 3350,1950 r0 top
R787 "07090686" SR0603 3840,1710 r0 top
R788 "07090686" SR0603 3350,1710 r0 top
R789 "07090686" SR0603 3670,760 r0 top
R790 "07090686" SR0603 3670,1950 r0 top
R791 "07090686" SR0603 3510,1710 r0 top
R792 "07090686" SR0603 3190,1950 r0 top
R793 "07090686" SR0603 3840,760 r0 top
R794 "07090686" SR0603 4160,7380 r270 top
R795 "07090686" SR0603 3450,7740 r270 bottom
R796 "07090779" sr0805 8400,7250 r270 top
R797 "07090779" sr0805 8300,6780 r270 top
R798 "07090779" sr0805 8030,7740 r270 bottom
R799 "07090779" sr0805 7970,7240 r270 top
R800 "07090779" sr0805 8170,7740 r270 bottom
R801 "07090686" SR0603 5490,7740 r270 top
R802 "07090887" SR0603 5390,7740 r90 top
R803 "07090887" SR0603 5715,7740 r270 top
R804 "07090686" SR0603 5600,7740 r270 top
R805 "07090686" SR0603 5490,7240 r270 top
R806 "07090887" SR0603 5390,7240 r90 top
R807 "07090887" SR0603 5710,7240 r270 top
R808 "07090686" SR0603 5590,7240 r270 top
R809 "07090686" SR0603 5490,6770 r270 top
R810 "07090887" SR0603 5390,6770 r90 top
R811 "07090887" SR0603 5610,6670 r0 top
R812 "07090686" SR0603 5600,6770 r270 top
R813 "07090887" SR0603 2030,6730 r270 top
R814 "07090686" SR0603 1905,6735 r270 top
R815 "07090686" SR0603 1795,6730 r270 top
R816 "07090887" SR0603 1710,6730 r90 top
R817 "07090887" SR0603 2010,7240 r270 top
R818 "07090686" SR0603 1910,7240 r270 top
R819 "07090686" SR0603 1810,7240 r270 top
R820 "07090887" SR0603 1710,7240 r90 top
R821 "07090887" SR0603 2010,7590 r270 top
R822 "07090686" SR0603 2010,7740 r270 top
R823 "07090686" SR0603 1910,7740 r270 top
R824 "07090887" SR0603 1710,7740 r90 bottom
R825 "07090887" SR0603 2460,6730 r270 top
R826 "07090686" SR0603 2520,6850 r270 top
R827 "07090887" SR0603 2450,7230 r270 top
R828 "07090686" SR0603 2510,7260 r270 top
R829 "07090887" SR0603 2460,7740 r270 top
R830 "07090686" SR0603 2360,7740 r270 top
R831 "07090779" sr0805 8400,6780 r270 top
R832 "07090779" sr0805 8100,7740 r270 bottom
R833 "07090779" sr0805 8240,7740 r270 bottom
R834 "07090779" sr0805 8480,7250 r270 top
R835 "07090779" sr0805 8040,7240 r270 top
R836 "07090779" sr0805 8040,6770 r270 top
R837 "07090686" SR0603 9160,2120 r90 top
R838 "07090686" SR0603 8970,2310 r90 bottom
R839 "07090686" SR0603 3530,2340 r90 top
R840 "07090686" SR0603 3530,2480 r270 top
R841 "07090686" SR0603 3510,1950 r0 top
R842 "07090686" SR0603 3190,1710 r0 top
R843 "07090686" SR0603 2890,620 r90 bottom
R844 "07090686" SR0603 2960,620 r90 bottom
R845 "07090887" SR0603 2130,7230 r90 top
R846 "07090686" SR0603 2255,7230 r270 top
R847 "07090887" SR0603 2140,7740 r90 top
R848 "07090686" SR0603 2260,7740 r270 top
R849 "07090686" SR0603 2260,6730 r270 top
R850 "07090887" SR0603 2120,6730 r90 top
R851 "07090779" sr0805 7830,6770 r270 top
R852 "07090686" SR0603 4230,7380 r270 top
R853 "07090686" SR0603 3580,7760 r270 bottom
R854 "07090686" SR0603 3270,7220 r270 top
R855 "07090686" SR0603 3350,1120 r0 top
R856 "07090686" SR0603 3670,1120 r0 top
R857 "07090686" SR0603 3350,930 r0 top
R858 "07090686" SR0603 3230,3760 r270 top
R859 "07090686" SR0603 7820,3300 r90 top
R860 "07090686" SR0603 3810,6260 r270 top
R861 "07090686" SR0603 3610,7220 r270 top
R862 "07090700" SR0603 7360,2150 r270 top
R863 "07090700" SR0603 140,1440 r90 bottom
R864 "07090225" sr0805 7310,370 r270 top
R865 "07090700" SR0603 5850,1650 r90 top
R866 "07090700" SR0603 390,3180 r180 bottom
R867 "07090700" SR0603 390,3360 r0 bottom
R869 "07090700" SR0603 390,3120 r180 bottom
R870 "07090700" SR0603 390,3240 r0 bottom
R871 "07090686" SR0603 410,6110 r90 top
R872 "07090686" SR0603 300,6600 r270 top
R873 "07090686" SR0603 190,6110 r90 top
R874 "07090387" SR0603 2080,1380 r180 bottom
R875 "07090387" SR0603 8170,630 r90 top
R876 "07090387" SR0603 7450,1280 r180 bottom
R877 "07090387" SR0603 8040,320 r90 top
R878 "07090387" SR0603 7610,540 r0 top
R879 "07090387" SR0603 8040,480 r90 top
R880 "07090387" SR0603 7460,540 r0 top
R881 "07090387" SR0603 8040,630 r90 top
R882 "07090387" SR0603 7290,540 r0 top
R883 "07090387" SR0603 7880,320 r90 top
R884 "07090387" SR0603 7610,470 r0 top
R885 "07090387" SR0603 7880,480 r90 top
R886 "07090387" SR0603 7460,470 r0 top
R887 "07090387" SR0603 7880,630 r90 top
R888 "07090916" SR0603 4760,2570 r270 top
R889 "07090916" SR0603 4970,2570 r270 top
R890 "07090916" SR0603 4610,2570 r270 bottom
R891 "07090601" SR0603 641.63,2444.11 r90 top
R892 "07090601" SR0603 571.63,2444.11 r90 top
R893 "07090601" SR0603 240,2050 r90 top
R894 "07090601" SR0603 310,2050 r90 top
R895 "07090601" SR0603 8720,2110 r90 top
R896 "07090601" SR0603 8890,1840 r270 top
R897 "07090601" SR0603 8990,2440 r90 top
R898 "07090601" SR0603 8880,2440 r90 top
R899 "07090601" SR0603 3000,2340 r90 top
R900 "07090601" SR0603 3000,2210 r270 top
R901 "07090601" SR0603 3000,2470 r90 top
R902 "07090601" SR0603 3000,2590 r90 top
R903 "07090916" SR0603 6550,2570 r270 bottom
R904 "07090916" SR0603 4230,2570 r270 bottom
R905 "07090916" SR0603 4970,2570 r270 bottom
R906 "07090916" SR0603 5220,2570 r270 top
R907 "07090916" SR0603 5220,2570 r270 bottom
R908 "07090916" SR0603 5610,2570 r90 top
R909 "07090916" SR0603 4160,2570 r270 top
R910 "07090916" SR0603 5320,2570 r270 bottom
R911 "07090916" SR0603 5530,2570 r270 bottom
R912 "07090916" SR0603 6090,2570 r90 top
R913 "07090601" SR0603 4310,2570 r270 bottom
R914 "07090916" SR0603 5470,2570 r270 top
R915 "07090916" SR0603 4670,2570 r270 top
R916 "07090916" SR0603 4360,2570 r270 top
R917 "07090916" SR0603 6240,2570 r90 top
R918 "07090916" SR0603 4520,2570 r270 bottom
R919 "07090916" SR0603 3700,2570 r270 bottom
R920 "07090916" SR0603 4460,2570 r270 top
R921 "07090916" SR0603 4060,2570 r270 bottom
R922 "07090916" SR0603 4000,2570 r270 top
R923 "07090916" SR0603 3850,2570 r270 top
R924 "07090916" SR0603 3760,2570 r270 top
R925 "07090916" SR0603 5770,2570 r270 top
R926 "07090601" SR0603 7830,3590 r270 bottom
R927 "07090916" SR0603 5930,2570 r270 top
R928 "07090916" SR0603 6090,2570 r90 bottom
R929 "07090916" SR0603 6390,2570 r90 top
R930 "07090916" SR0603 5320,2570 r270 top
R931 "07090916" SR0603 4760,2570 r270 bottom
R932 "07090916" SR0603 3020,3540 r270 top
R933 "07090916" SR0603 5770,2570 r270 bottom
R936 "07090554" sr0805 8670,2740 r180 top
R937 "07090554" sr0805 8970,2740 r180 top
R938 "07090554" sr0805 9270,2740 r180 top
R939 "07090554" sr0805 9570,2740 r180 top
R940 "07090554" sr0805 9120,2740 r180 top
R941 "07090554" sr0805 8820,2740 r180 top
R942 "07090554" sr0805 1910,2950 r180 top
R943 "07090554" sr0805 2570,2950 r180 top
R944 "07090554" sr0805 2410,2180 r180 top
R945 "07090554" sr0805 2570,2180 r180 top
R946 "07090554" sr0805 2080,2180 r180 top
R947 "07090554" sr0805 1730,2180 r180 top
R960 "07090554" sr0805 8210,2740 r180 top
R961 "07090554" sr0805 370,2490 r90 bottom
R962 "07090554" sr0805 4150,4510 r90 top
R963 "07090554" sr0805 3710,4510 r90 top
R964 "07090554" sr0805 10510,1090 r270 bottom
R965 "07090554" sr0805 820,7390 r270 bottom
R970 "07090554" sr0805 5420,770 r270 bottom
R971 "07090554" sr0805 1240,7030 r270 top
R972 "07090554" sr0805 1040,7390 r270 top
R973 "07090554" sr0805 10290,6940 r270 bottom
R974 "07090554" sr0805 10060,6940 r270 top
R975 "07090554" sr0805 10400,6940 r270 top
R976 "07090554" sr0805 9730,6940 r270 top
R977 "07090554" sr0805 9840,6940 r270 top
R978 "07090554" sr0805 9390,6940 r270 top
R979 "07090554" sr0805 9950,6940 r270 bottom
R980 "07090554" sr0805 10060,6940 r270 bottom
R982 "07090554" sr0805 9590,6940 r270 bottom
R983 "07090554" sr0805 9740,6000 r270 bottom
R984 "07090522" SR0603 10330,1820 r270 bottom
R988 "07090522" SR0603 360,2670 r90 bottom
R989 "07090603" SR0603 280,1560 r180 top
R990 "07090603" SR0603 280,1630 r180 top
R991 "07090603" SR0603 571.63,1954.11 r270 top
R992 "07090603" SR0603 641.63,1954.11 r270 top
R993 "07090603" SR0603 9030,1500 r0 bottom
R994 "07090603" SR0603 9030,1020 r0 top
R995 "07090603" SR0603 9030,1130 r0 top
R996 "07090603" SR0603 9030,920 r0 top
R997 "07090603" SR0603 9030,1330 r0 top
R998 "07090603" SR0603 9030,1230 r0 top
R999 "07090603" SR0603 8410,2140 r90 top
R1000 "07090603" SR0603 8500,2140 r90 top
R1001 "07090603" SR0603 2440,780 r270 bottom
R1002 "07090603" SR0603 2350,780 r270 bottom
R1003 "07090603" SR0603 2080,780 r270 top
R1004 "07090603" SR0603 8470,630 r270 top
R1005 "07090603" SR0603 8340,630 r270 bottom
R1006 "07090603" SR0603 8300,1840 r90 top
R1007 "07090603" SR0603 8610,1840 r90 top
R1008 "07090603" SR0603 8510,1840 r90 top
R1009 "07090603" SR0603 8610,2140 r90 top
R1010 "07090603" SR0603 8410,1840 r90 top
R1011 "07090603" SR0603 8640,630 r270 bottom
R1012 "07090603" SR0603 7900,2140 r90 top
R1013 "07090603" SR0603 9030,1630 r0 top
R1014 "07090603" SR0603 7900,1840 r270 top
R1015 "07090603" SR0603 1980,780 r270 top
R1016 "07090603" SR0603 1780,780 r270 top
R1017 "07090603" SR0603 8200,2140 r270 top
R1018 "07090603" SR0603 8300,1840 r270 bottom
R1019 "07090603" SR0603 8300,2140 r270 top
R1020 "07090603" SR0603 8780,1650 r90 bottom
R1021 "07090603" SR0603 8510,1840 r270 bottom
R1031 "07090603" SR0603 7210,2150 r90 top
R1032 "07090603" SR0603 1660,1000 r180 top
R1033 "07090603" SR0603 1370,1300 r180 top
R1034 "07090603" SR0603 1370,1200 r180 top
R1035 "07090603" SR0603 1660,1100 r180 top
R1036 "07090603" SR0603 1070,1000 r180 top
R1037 "07090603" SR0603 1660,1990 r180 top
R1038 "07090603" SR0603 1880,780 r270 bottom
R1039 "07090603" SR0603 2520,780 r270 bottom
R1040 "07090603" SR0603 2210,2290 r90 bottom
R1041 "07090603" SR0603 2080,2290 r90 bottom
R1042 "07090603" SR0603 2300,2290 r90 bottom
R1043 "07090603" SR0603 1880,780 r270 top
R1044 "07090603" SR0603 1370,1100 r180 top
R1045 "07090603" SR0603 1530,865 r180 top
R1046 "07090603" SR0603 1370,1000 r180 top
R1047 "07090603" SR0603 1660,1300 r180 top
R1048 "07090263" SR0603 5400,500 r180 bottom
R1049 "07090603" SR0603 7298.57,1347 r0 bottom
R1050 "07090603" SR0603 8850,630 r270 top
R1051 "07090603" SR0603 7140,1510 r180 bottom
R1052 "07090603" SR0603 5390,610 r0 top
R1053 "07090603" SR0603 5620,470 r180 top
R1054 "07090603" SR0603 8480,630 r90 bottom
R1055 "07090603" SR0603 8260,630 r270 top
R1056 "07090603" SR0603 8740,630 r90 bottom
R1057 "07090603" SR0603 2180,780 r270 top
R1058 "07090603" SR0603 1070,1100 r180 top
R1059 "07090603" SR0603 8570,630 r270 bottom
R1060 "07090603" SR0603 8170,480 r270 top
R1061 "07090603" SR0603 1660,1810 r180 top
R1062 "07090603" SR0603 1660,1450 r180 top
R1063 "07090603" SR0603 1070,1200 r180 top
R1064 "07090603" SR0603 2690,2500 r90 top
R1065 "07090603" SR0603 2790,2500 r90 top
R1066 "07090603" SR0603 2240,1810 r90 bottom
R1067 "07090603" SR0603 8200,1840 r270 top
R1068 "07090603" SR0603 1660,1900 r180 top
R1069 "07090603" SR0603 1660,1720 r180 top
R1070 "07090603" SR0603 1660,1200 r180 top
R1071 "07090603" SR0603 8100,2140 r90 top
R1072 "07090603" SR0603 8000,1840 r90 top
R1073 "07090603" SR0603 8000,2140 r90 top
R1074 "07090603" SR0603 8100,1840 r90 top
R1075 "07090603" SR0603 9030,1430 r180 top
R1076 "07090603" SR0603 9030,1500 r0 top
R1077 "07090225" sr0805 2610,6420 r270 top
R1078 "07090534" sr0805 6960,3809.09 r270 top
R1079 "07090225" sr0805 8740,610 r270 top
R1080 "07090225" sr0805 1120,900 r180 top
R1081 "07090534" sr0805 7040,3630 r270 top
R1082 "07090225" sr0805 8570,620 r270 top
R1083 "07090225" sr0805 2800,790 r270 top
R1084 "07090225" sr0805 5390,4790 r270 top
R1085 "07090225" sr0805 4910,5450 r270 top
R1086 "07090225" sr0805 4030,6540 r270 top
R1087 "07090225" sr0805 4280,4650 r270 bottom
R1088 "07090225" sr0805 3690,4860 r90 bottom
R1093 "07090225" sr0805 3870,4510 r270 top
R1095 "07090225" sr0805 8360,620 r270 top
R1096 "07090225" sr0805 2560,770 r270 top
R1097 "07090534" sr0805 5500,4790 r90 top
R1098 "07090534" sr0805 5140,5600 r270 top
R1099 "07090534" sr0805 4130,6300 r270 top
R1100 "07090225" sr0805 680,7030 r270 top
R1101 "07090225" sr0805 3620,4470 r270 bottom
R1102 "07090225" sr0805 5620,1570 r270 bottom
R1103 "07090033" sr1206 6130,4630 r0 top
R1104 "07090033" sr1206 6130,4520 r0 top
R1105 "07090033" sr1206 5930,4520 r180 top
R1106 "07090033" sr1206 5930,4630 r180 top
R1107 "07090033" sr1206 5090,4490 r0 top
R1108 "07090033" sr1206 5090,4380 r0 top
R1109 "07090033" sr1206 4870,4380 r180 top
R1110 "07090033" sr1206 4870,4490 r180 top
R1111 "07090231" sr0805 10390,6010 r90 top
R1112 "07090231" sr0805 10040,5750 r180 top
R1113 "07090231" sr0805 3980,3290 r90 top
R1114 "07090231" sr0805 4080,3780 r270 top
R1115 "07090231" sr0805 3920,3780 r270 top
R1118 "07090231" sr0805 9850,3530 r90 top
R1119 "07090231" sr0805 9760,3880 r90 top
R1120 "07090231" sr0805 2950,5340 r90 bottom
R1121 "07090231" sr0805 2000,4970 r90 bottom
R1122 "07090231" sr0805 2300,4960 r90 bottom
R1123 "07090231" sr0805 2630,5280 r90 top
R1124 "07090231" sr0805 9240,3880 r90 top
R1125 "07090231" sr0805 8690,3530 r90 top
R1126 "07090231" sr0805 9160,3880 r90 top
R1127 "07090231" sr0805 9210,3530 r90 top
R1128 "07090231" sr0805 2660,4970 r90 bottom
R1129 "07090231" sr0805 1810,5280 r90 top
R1130 "07090231" sr0805 1340,5280 r90 top
R1131 "07090231" sr0805 3100,4960 r90 bottom
R1132 "07090231" sr0805 1500,5070 r90 bottom
R1133 "07090231" sr0805 1990,5280 r90 top
R1136 "07090231" sr0805 10380,3880 r90 top
R1139 "07090231" sr0805 7010,4900 r270 top
R1140 "07090231" sr0805 7010,6050 r270 top
R1143 "07090231" sr0805 9840,7720 r90 top
R1144 "07090231" sr0805 9500,7720 r90 top
R1145 "07090231" sr0805 10180,7720 r90 bottom
R1146 "07090231" sr0805 9830,7720 r90 bottom
R1147 "07090231" sr0805 10200,7690 r180 top
R1148 "07090231" sr0805 10450,7680 r180 top
R1149 "07090231" sr0805 9730,7720 r90 top
R1150 "07090231" sr0805 10060,7720 r90 bottom
R1151 "07090231" sr0805 1060,7720 r270 top
R1152 "07090231" sr0805 570,7200 r270 top
R1153 "07090231" sr0805 8360,2540 r180 bottom
R1154 "07090231" sr0805 7410,330 r90 bottom
R1155 "07090231" sr0805 6290,5890 r90 top
R1156 "07090231" sr0805 6630,3290 r90 top
R1157 "07090231" sr0805 5560,3800 r270 top
R1158 "07090231" sr0805 6770,3290 r90 top
R1159 "07090231" sr0805 6320,5040 r270 bottom
R1160 "07090231" sr0805 6794.31,3809.09 r270 top
R1161 "07090231" sr0805 5640,3800 r270 top
R1162 "07090231" sr0805 6864.31,3809.09 r270 top
R1163 "07090231" sr0805 6540,4720 r270 top
R1164 "07090231" sr0805 6240,3800 r270 top
R1165 "07090231" sr0805 6660,4360 r270 top
R1166 "07090231" sr0805 6080,3800 r270 top
R1167 "07090231" sr0805 1490,7730 r270 bottom
R1168 "07090231" sr0805 1220,7020 r270 bottom
R1169 "07090231" sr0805 1310,7730 r270 bottom
R1170 "07090231" sr0805 1620,7020 r270 bottom
R1171 "07090231" sr0805 5570,3290 r90 top
R1172 "07090231" sr0805 5720,3800 r270 top
R1176 "07090231" sr0805 5980,5040 r90 bottom
R1177 "07090231" sr0805 5960,5830 r270 bottom
R1181 "07090231" sr0805 7160,5070 r270 top
R1182 "07090231" sr0805 7000,4460 r270 bottom
R1189 "07090231" sr0805 4970,3780 r270 top
R1190 "07090231" sr0805 4870,3780 r270 top
R1191 "07090231" sr0805 2460,5280 r90 top
R1192 "07090231" sr0805 1660,5070 r90 bottom
R1193 "07090231" sr0805 5390,6260 r270 top
R1194 "07090231" sr0805 4770,6220 r270 top
R1195 "07090231" sr0805 4530,5260 r270 bottom
R1196 "07090231" sr0805 8400,5980 r270 bottom
R1197 "07090231" sr0805 8650,6390 r270 top
R1198 "07090231" sr0805 6654.31,3809.09 r270 top
R1199 "07090231" sr0805 6090,3290 r90 top
R1200 "07090231" sr0805 4490,3310 r90 top
R1201 "07090231" sr0805 4270,3310 r90 top
R1202 "07090231" sr0805 4640,3780 r270 top
R1203 "07090231" sr0805 4530,3780 r270 top
R1204 "07090231" sr0805 4430,3780 r270 top
R1205 "07090231" sr0805 4320,3780 r270 top
R1206 "07090231" sr0805 5020,3300 r90 top
R1207 "07090231" sr0805 4800,3300 r270 top
R1208 "07090231" sr0805 5140,3780 r270 top
R1209 "07090231" sr0805 5060,3780 r270 top
R1210 "07090231" sr0805 2890,3190 r270 top
R1211 "07090231" sr0805 2810,3190 r270 top
R1212 "07090231" sr0805 6220,3290 r90 top
R1213 "07090231" sr0805 6724.31,3809.09 r270 top
R1214 "07090231" sr0805 6440,4900 r270 top
R1215 "07090231" sr0805 6680,6050 r270 top
R1216 "07090231" sr0805 6320,3800 r270 top
R1217 "07090231" sr0805 6160,3800 r270 top